# EAGLE board HEG_Sensor (EAGLE 9.5.1)
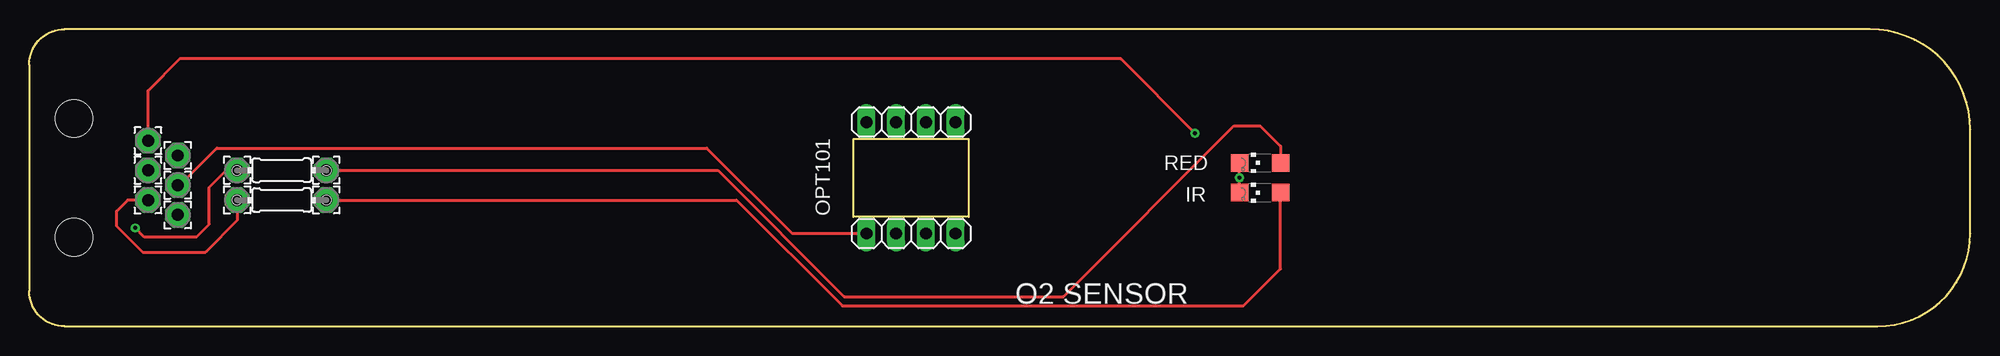
[diagram p0: board, top side]
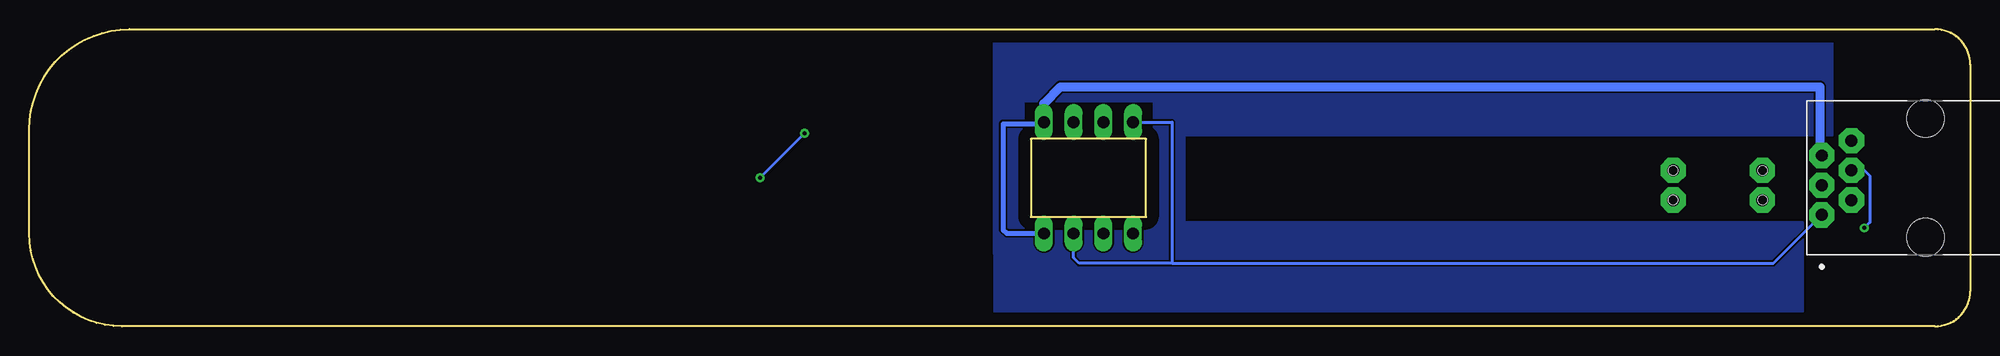
[diagram p1: board, bottom side, seen from below]

Size 165.99 x 25.4 mm. Coordinates in mm from the lower left corner, seen from the top.
Outline: 0,22.38 0,3.02 arc90 3.02,0 158.05,0 arc90 165.99,7.94 165.99,16.83 arc90 157.42,25.4 3.02,25.4 arc90 0,22.38
Outline: 70.48,16.03 80.33,16.03 80.33,9.37 70.48,9.37 70.48,16.03
Copper layers (1*16): Top 0.035mm / dielectric 1.5mm / Bottom 0.035mm
Design rules "default": minimum track width 6mil, minimum drill 0.35mm, track to track 6mil, track to pad 6mil, pad to pad 6mil, via to via 6mil, smd to smd 6mil, copper to edge 40mil, drill to drill 6mil, minimum pad ring 10mil, minimum via ring 8mil, stop-mask expansion 4mil, vias tented up to drill 0mil, thermal gap 10mil
Holes 0.8 mm at 17.78,13.33 17.78,10.79 25.4,10.79 25.4,13.33 17.78,13.33 25.4,13.33 25.4,10.79 17.78,10.79

## Footprints (pad centres in the part's own frame; a part is rotated, then mirrored left to right if it is on the bottom)
2,15/1,0 = drill 1.016 pad 2.159 octagon: 1 0,0
CHIPLED_1206 = smd 1.5 x 1.5: A 0,-1.75; C 0,1.75
ASSMANN_A-2004-1-4-LP-N-R = drill 0.9 square: 1 -3.175,8.89 | drill 0.9: 2 -1.905,6.35; 3 -0.635,8.89; 4 0.635,6.35; 5 1.905,8.89; 6 3.175,6.35 | hole 3.2: -5.08,0; 5.08,0
1X04 = drill 1.016 long: 1 -3.81,0; 2 -1.27,0; 3 1.27,0; 4 3.81,0
0204/7 = drill 0.813 octagon: 1 -3.81,0; 2 3.81,0

## Placement (x,y rotation side)
E$1  [2,15/1,0]  25.4,13.33 0 top
E$2  [2,15/1,0]  25.4,10.79 0 top
E$3  [2,15/1,0]  17.78,10.79 0 top
E$4  [2,15/1,0]  17.78,13.33 0 top
E$5  [2,15/1,0]  10.16,15.88 0 top
E$6  [2,15/1,0]  12.7,14.6 0 top
E$7  [2,15/1,0]  12.7,12.06 0 top
E$8  [2,15/1,0]  10.16,13.33 0 top
E$9  [2,15/1,0]  10.16,10.79 0 top
E$10  [2,15/1,0]  12.7,9.52 0 top
IR  DN1102W  [CHIPLED_1206]  105.25,11.43 90 top
J1  A-2004-1-4-LP-N-R  [ASSMANN_A-2004-1-4-LP-N-R]  3.81,12.7 90 bottom
JP2  [1X04]  75.41,7.94 0 top
OPT101  [1X04]  75.41,17.46 0 top
R1  470  [0204/7]  21.59,10.79 180 top
R2  62  [0204/7]  21.59,13.33 180 top
RED  BR1102W  [CHIPLED_1206]  105.25,13.97 90 top

## Library data of the parts
E$1-E$10 = wirepad
IR RED = led
J1 = A-2004-1-4-LP-N-R; DESCRIPTION: Jack Modular Connector 6p6c _RJ11, RJ12, RJ14, RJ25_ 90° Angle-Right Unshielded; DIGI-KEY_PART_NUMBER: AE10383-ND; DIGI-KEY_PURCHASE_URL: https://www.digikey.com/product-detail/en/assmann-wsw-components/A-2004-1-4-LP-N-R/AE10383-ND/2183634?utm_source=snapeda&utm_medium=aggregator&utm_campaign=symbol; MF: Assmann WSW; MP: A-2004-1-4-LP-N-R; PACKAGE: None
JP2 OPT101 = pinhead
R1 R2 = resistor

## Nets
AIN0: J1.5 OPT101.4
GND_ANA: OPT101.1
GND_DIG: J1.6
VBAT: J1.3 JP2.1
VIR: J1.2 R1.2
VIR_: R1.1
VRED: J1.4 R2.2
VRED_: R2.1

## Tracks (layer width: path | path; a pad name or v marks a point on that pad's centre or on a via)
AIN0
  Bottom 0.305: 12.86,14.76 J1.5
  Bottom 0.406: OPT101.4 79.37,17.3 82.71,17.3 82.71,8.25 82.39,7.94 79.22,7.94
  Bottom 0.762: OPT101.4 79.22,19.05 77.79,20.48 12.86,20.48 12.86,14.76
BOT_PLANE
  pour Bottom: 14.29,8.89 83.5,8.89 83.5,1.27 14.29,1.27
  pour Bottom: 11.75,16.35 11.75,24.61 69.85,24.61 69.85,16.35
  pour Bottom: 66.67,19.21 83.5,19.21 83.5,24.61 66.67,24.61
  pour Bottom: 69.85,6.19 67.15,6.19 67.15,16.35 69.85,16.35
  pour Bottom: 80.96,19.21 80.96,6.19 83.5,6.19 83.5,19.21
GND_ANA
  Bottom 0.254: OPT101.1 68.26,17.46 68.26,5.4 | 68.26,5.4 16.83,5.4 12.7,9.52 | 68.26,5.4 76.2,5.4 76.68,5.87 76.68,7.94
GND_DIG  (via drill 0.35)
  Top 0.254: J1.6 10.16,20.16 12.86,22.86 93.34,22.86 v99.7,16.51 | 103.5,11.27 v103.5,12.7 103.5,13.97
  Bottom 0.254: v103.5,12.7 v99.7,16.51
VBAT
  Top 0.254: J1.3 12.86,12.06 16.03,15.24 57.94,15.24 65.25,7.94 JP2.1
VIR
  Top 0.254: R1.2 17.78,9.05 15.08,6.35 9.68,6.35 7.46,8.57 7.46,9.84 8.41,10.79 J1.2
  Bottom 0.152: 17.76,10.81 R1.2
VIR_
  Top 0.254: 107,11.43 107,4.92 103.82,1.75 69.53,1.75 60.48,10.79 R1.1
VRED  (via drill 0.35)
  Top 0.254: v9.05,8.41 9.84,7.62 14.29,7.62 15.4,8.73 15.4,11.91 16.83,13.33 R2.2
  Bottom 0.254: J1.4 9.05,13.33 8.57,12.86 8.57,8.89 v9.05,8.41
VRED_
  Top 0.254: R2.1 58.9,13.33 69.69,2.54 88.42,2.54 103.03,17.14 105.25,17.14 107,15.4 107,13.97

## Text on the board
tPlace: O2 SENSOR